# Altium PCB Connector.PcbDoc
Units mm, origin at the board's own origin, x right, y up, seen from the top; angles counter-clockwise.
Board outline 59.94 x 59.94 mm, 2 copper layers (Top Layer, Bottom Layer); 2 components, 34 nets, 118 pads, 196 vias.
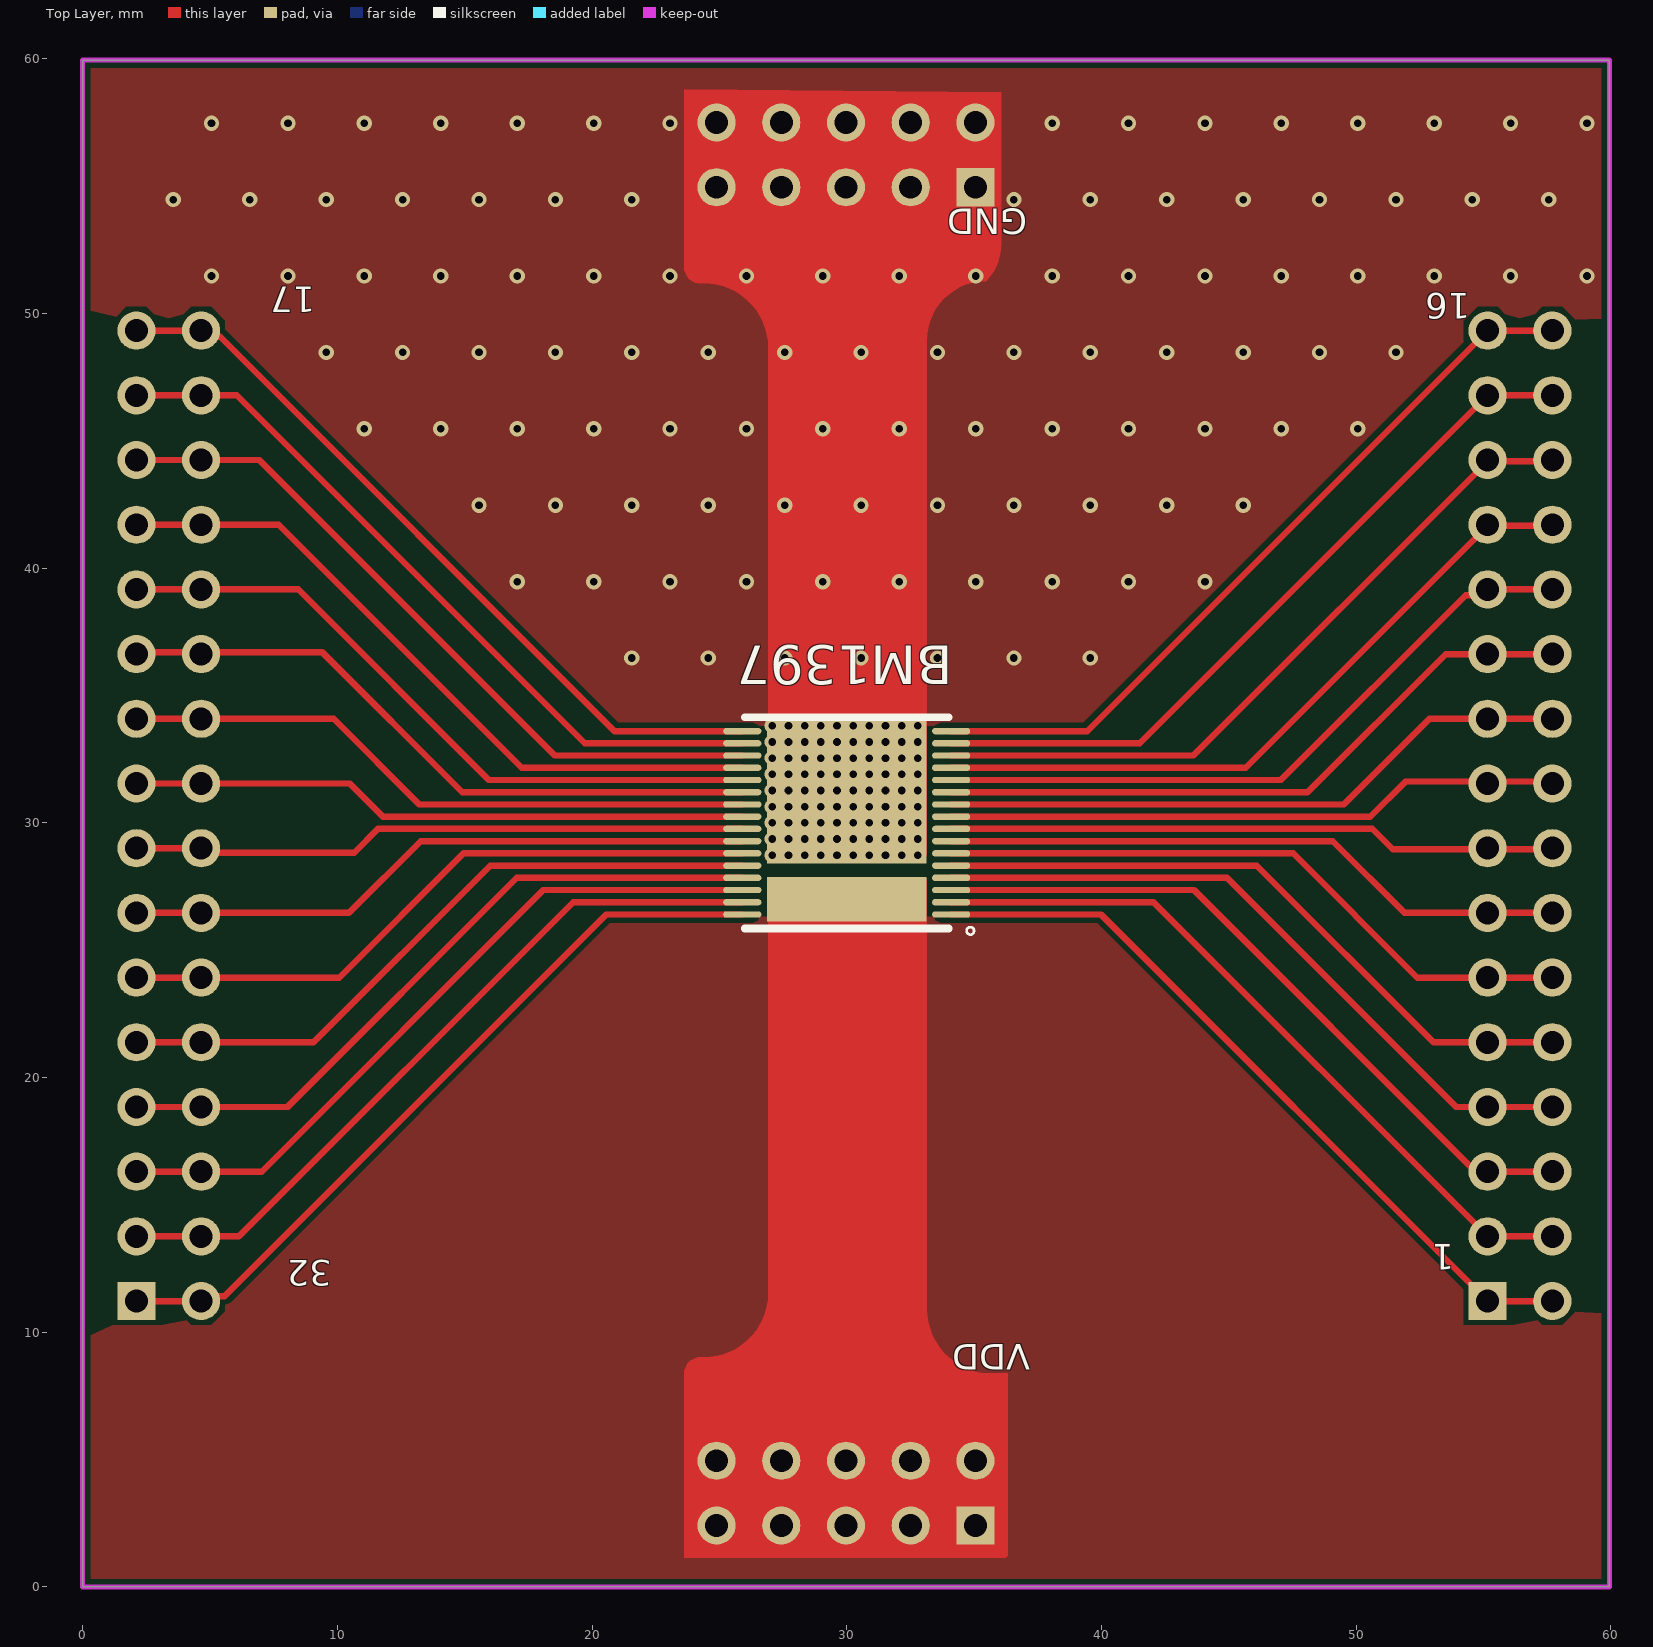
[diagram p0: Top Layer view]
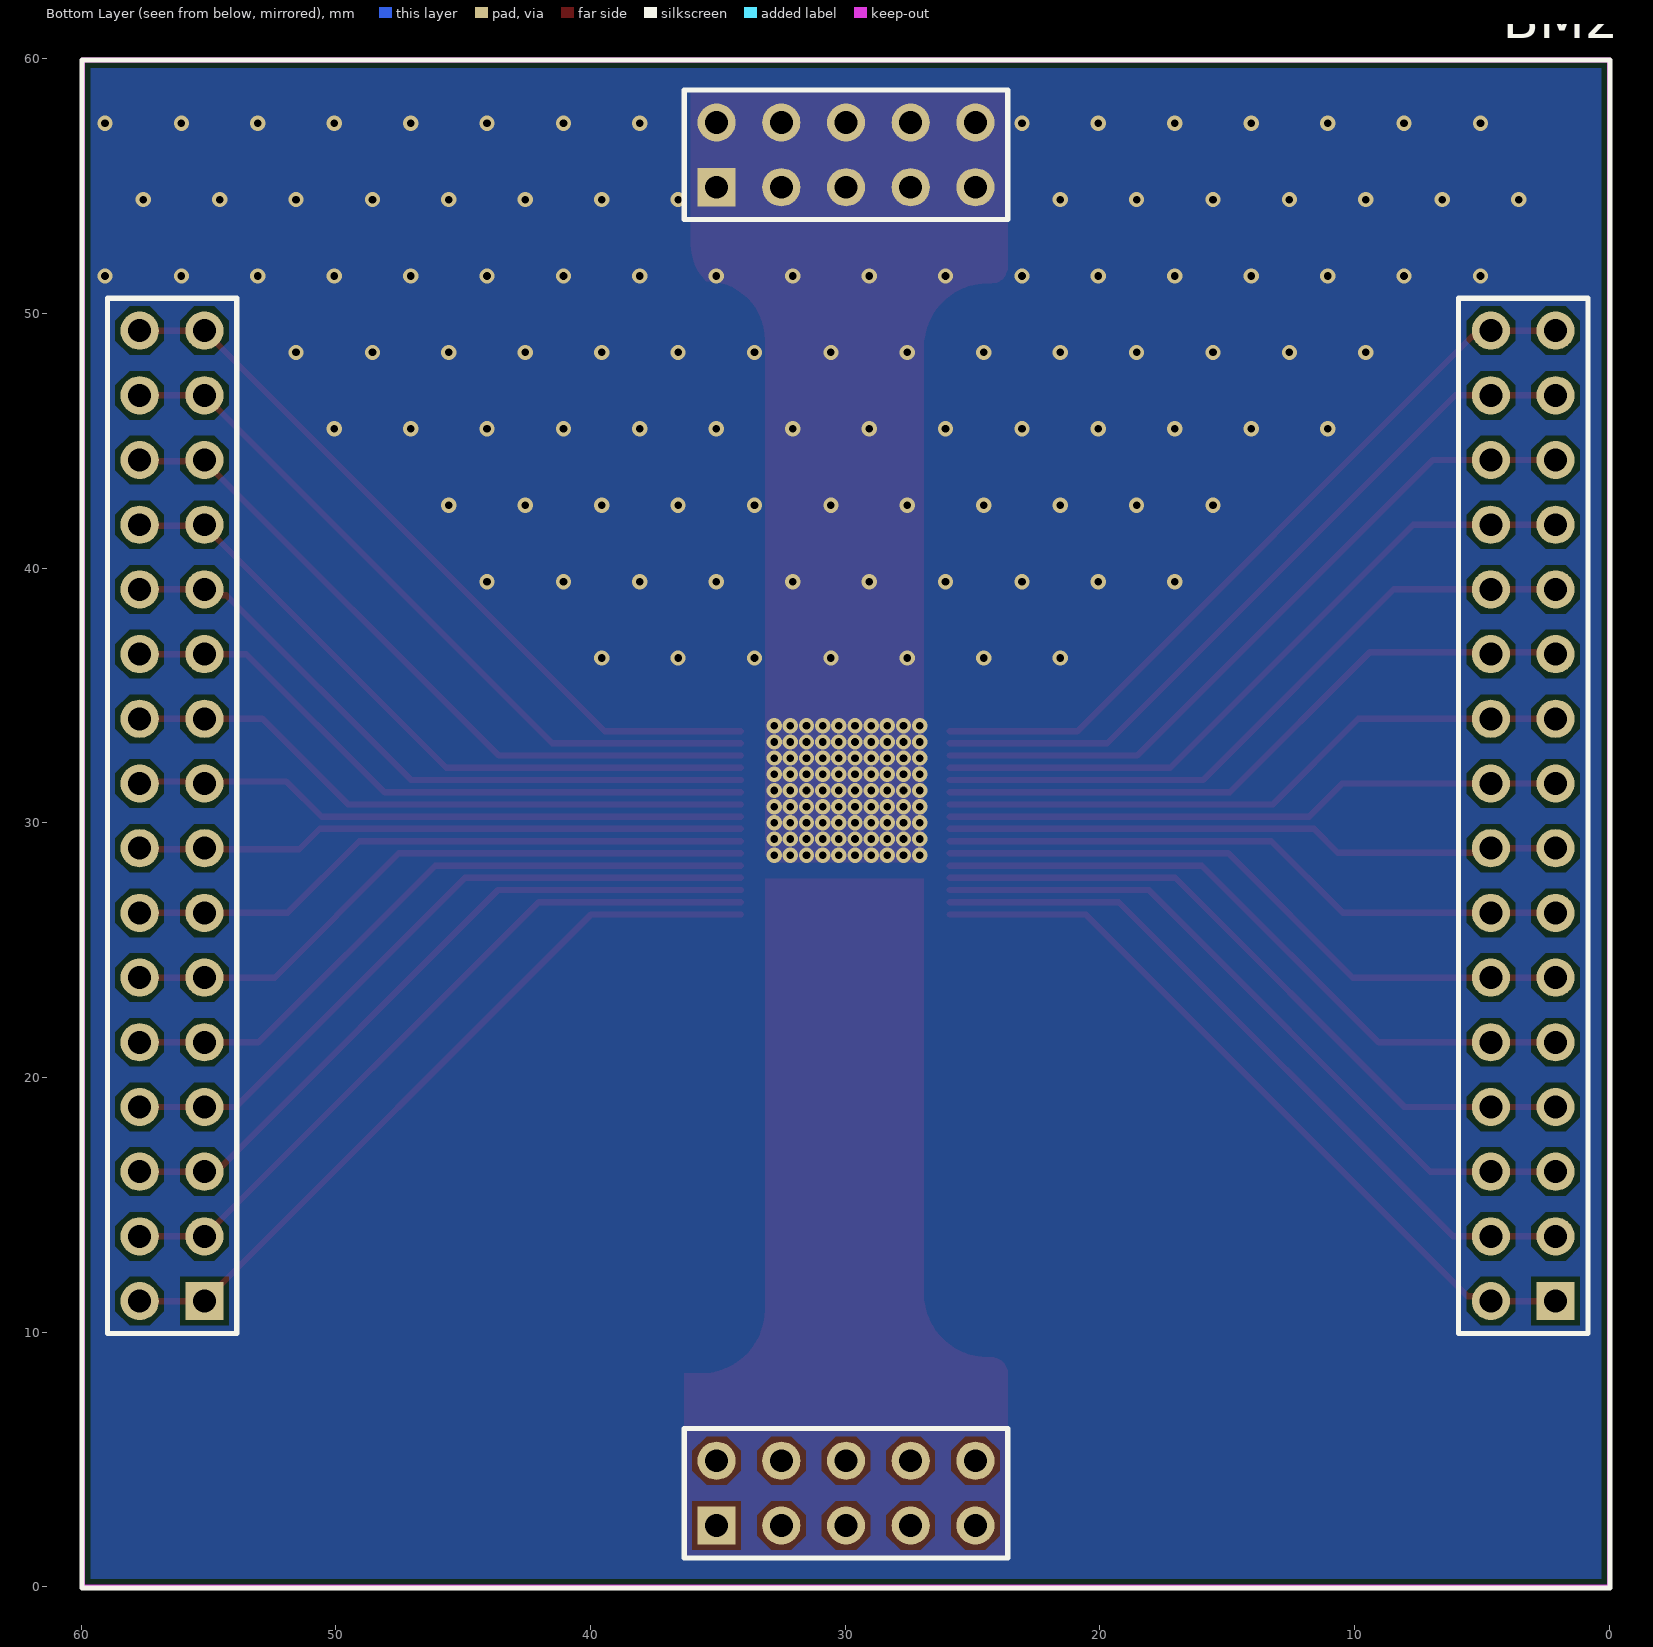
[diagram p1: Bottom Layer view, seen from below]

## Layer stack, top to bottom
Top Solder: solder mask 0.0102, Solder Resist, Dk 3.5
Top Layer: signal copper 0.0356
Dielectric 1: dielectric 0.32, FR-4, Dk 4.8
Bottom Layer: signal copper 0.0356
Bottom Solder: solder mask 0.0102, Solder Resist, Dk 3.5

## Board outline
0,0 0,59.944 59.944,59.944 59.944,0

## Design rules (kind name [scope] priority, off if disabled: settings)
Clearance [All] p1: gap=0.2 ignorepadtopadclearanceinfootprint=FALSE
PolygonConnect [All] p1: connectstyle=Direct reliefconductorwidth=0.254 reliefentries=4 polygonreliefangle="90 Angle" airgapwidth=0.254
RoomDefinition Connector [InComponentClass('Connector')] p1: confinementstyle=ConfineOut formatcopy=TRUE lockcomponents=FALSE outline -31.115,78.359 41.148,78.359 41.148,141.478 -31.115,141.478
RoutingVias [All] p1: holewidth=0.3 width=0.6 viastyle="Through Hole" minholewidth=0.3 minwidth=0.6 maxholewidth=0.3 maxwidth=0.6
SolderMaskExpansion [All] p1: expansion=0.102 istentingtop=FALSE
Width [All] p1: maxlimit=1 minlimit=0.2 preferedwidth=0.5
30 further rules are at their usual default settings.

## Components (designator, comment, footprint, x,y, rotation, side; value= is the part's Value field where it differs from the comment)
BM2 "BM1397" CONNECTOR 59.972,-0.047 r180 bottom locked
BM1397 "BM1397" BM1387 30,30 r180 top locked (schematic designator BM1)

## Footprints (in the part's own frame and the unit in brackets; to place one, negate y for a bottom-side part, rotate by r counter-clockwise, add the part's x,y. Pads: shape width x height; smd on the part's side, far side on the other; paste and mask are expansions set on the pad)
BM1387 [mm]
  oval 1.5x0.25 smd: 1(-4.1,3.6) 2(-4.1,3.12) 3(-4.1,2.64) 4(-4.1,2.16) 5(-4.1,1.68) 6(-4.1,1.2) 7(-4.1,0.72) 8(-4.1,0.24) 9(-4.1,-0.24) 10(-4.1,-0.72) 11(-4.1,-1.2) 12(-4.1,-1.68) 13(-4.1,-2.16) 14(-4.1,-2.64) 15(-4.1,-3.12) 16(-4.1,-3.6) 17(4.1,-3.6) 18(4.1,-3.12) 19(4.1,-2.64) 20(4.1,-2.16) 21(4.1,-1.68) 22(4.1,-1.2) 23(4.1,-0.72) 24(4.1,-0.24) 25(4.1,0.24) 26(4.1,0.72) 27(4.1,1.2) 28(4.1,1.68) 29(4.1,2.16) 30(4.1,2.64) 31(4.1,3.12) 32(4.1,3.6)
  rect 6.25x5.6 smd: 33(0,-1.2)
  rect 6.25x1.75 smd: 34(0,3)
  Top Layer pour cut-out: 4.953,3.683 -4.953,3.683 -4.953,-3.81 4.953,-3.81
  silkscreen extent -5,-4.15 4,4.39, body extent -4.09,-4.11 4.06,4.14, height 0.2
CONNECTOR [mm]
  round 1.5 hole 0.9: 1(2.27,11.27) 2(2.27,13.81) 2(4.81,13.81) 3(2.27,16.35) 3(4.81,16.35) 4(2.27,18.89) 4(4.81,18.89) 5(2.27,21.43) 5(4.81,21.43) 6(2.27,23.97) 6(4.81,23.97) 7(2.27,26.51) 7(4.81,26.51) 8(2.27,29.05) 8(4.81,29.05) 9(2.27,31.59) 9(4.81,31.59) 10(2.27,34.13) 10(4.81,34.13) 11(2.27,36.67) 11(4.81,36.67) 12(2.27,39.21) 12(4.81,39.21) 13(2.27,41.75) 13(4.81,41.75) 14(2.27,44.29) 14(4.81,44.29) 15(2.27,46.83) 15(4.81,46.83) 16(2.27,49.37) 16(4.81,49.37) 17(55.317,49.37) 17(57.857,49.37) 18(55.317,46.83) 18(57.857,46.83) 19(55.317,44.29) 19(57.857,44.29) 20(55.317,41.75) 20(57.857,41.75) 21(55.317,39.21) 21(57.857,39.21) 22(55.317,36.67) 22(57.857,36.67) 23(55.317,34.13) 23(57.857,34.13) 24(55.317,31.59) 24(57.857,31.59) 25(55.317,29.05) 25(57.857,29.05) 26(55.317,26.51) 26(57.857,26.51) 27(55.317,23.97) 27(57.857,23.97) 28(55.317,21.43) 28(57.857,21.43) 29(55.317,18.89) 29(57.857,18.89) 30(55.317,16.35) 30(57.857,16.35) 31(55.317,13.81) 31(57.857,13.81) 32(55.317,11.27) 33(24.92,57.54) 33(27.46,55) 33(27.46,57.54) 33(30,55) 33(30,57.54) 33(32.54,55) 33(32.54,57.54) 33(35.08,55) 33(35.08,57.54) 34(24.92,5) 34(27.46,2.46) 34(27.46,5) 34(30,2.46) 34(30,5) 34(32.54,2.46) 34(32.54,5) 34(35.08,2.46) 34(35.08,5)
  rect 1.5x1.5 hole 0.9: 1(4.81,11.27) 32(57.857,11.27) 33(24.92,55) 34(24.92,2.46)
  silkscreen extent 0,0 60,60

## Part data
BM2 BM1397: library part BM1397_0

## Via types
v1: diameter 0.6, hole 0.3, Top Layer to Bottom Layer, 196 vias

## Nets (pads, with @x,y where several pads share a name; then routed paths per layer and width w, separated by ;. In a path a pad name is that pad's centre, name@x,y a point inside that pad or via, vN(x,y) a via of type N, cw(c..) or ccw(c..) an arc to the next point about the centre after c; other vN are vias at no path point)
1: BM2.1 BM1397.1 | length 29.9
  Top Layer w0.25: BM1397.1 39.985,26.4 55.162,11.223 BM2.1@57.702,11.223
2: BM2.2 BM1397.2 | length 29
  Top Layer w0.25: BM1397.2 42.045,26.88 55.162,13.763 BM2.2@57.702,13.763
3: BM2.3 BM1397.3 | length 28.2
  Top Layer w0.25: BM1397.3 43.633,27.36 54.451,16.542 54.923,16.542 55.162,16.303 BM2.3@57.702,16.303
4: BM2.4 BM1397.4 | length 27.3
  Top Layer w0.25: BM1397.4 44.931,27.84 53.928,18.843 55.162,18.843 BM2.4@57.702,18.843
5: BM2.5 BM1397.5 | length 26.5
  Top Layer w0.25: BM1397.5 46.102,28.32 53.039,21.383 55.162,21.383 BM2.5@57.702,21.383
6: BM2.6 BM1397.6 | length 25.6
  Top Layer w0.25: BM1397.6 47.527,28.8 52.404,23.923 55.162,23.923 BM2.6@57.702,23.923
7: BM2.7 BM1397.7 | length 24.8
  Top Layer w0.25: BM1397.7 49.079,29.28 51.896,26.463 55.162,26.463 BM2.7@57.702,26.463
8: BM2.8 BM1397.8 | length 24
  Top Layer w0.25: BM1397.8 50.631,29.76 51.435,28.956 55.162,28.956 57.655,28.956 BM2.8@57.702,29.003
9: BM2.9 BM1397.9 | length 24.2
  Top Layer w0.25: BM1397.9 50.56,30.24 51.943,31.623 55.162,31.623 57.622,31.623 BM2.9@57.702,31.543
10: BM2.10 BM1397.10 | length 25
  Top Layer w0.25: BM1397.10 49.516,30.72 52.879,34.083 55.162,34.083 BM2.10@57.702,34.083
11: BM2.11 BM1397.11 | length 25.8
  Top Layer w0.25: BM1397.11 48.091,31.2 53.514,36.623 55.162,36.623 BM2.11@57.702,36.623
12: BM2.12 BM1397.12 | length 26.7
  Top Layer w0.25: BM1397.12 47.047,31.68 54.301,38.934 54.933,38.934 55.162,39.163 BM2.12@57.702,39.163
13: BM2.13 BM1397.13 | length 27.6
  Top Layer w0.25: BM1397.13 45.666,32.16 55.162,41.656 57.655,41.656 BM2.13@57.702,41.703
14: BM2.14 BM1397.14 | length 28.4
  Top Layer w0.25: BM1397.14 43.606,32.64 55.162,44.196 57.655,44.196 BM2.14@57.702,44.243
15: BM2.15 BM1397.15 | length 29.3
  Top Layer w0.25: BM1397.15 41.499,33.12 55.162,46.783 BM2.15@57.702,46.783
16: BM2.16 BM1397.16 | length 30.1
  Top Layer w0.25: BM1397.16 39.439,33.6 55.162,49.323 BM2.16@57.702,49.323
17: BM2.17 BM1397.17 | length 30.3
  Top Layer w0.25: BM2.17@2.115,49.323 4.655,49.323 4.894,49.084 5.399,49.084 20.883,33.6 BM1397.17
18: BM2.18 BM1397.18 | length 29.4
  Top Layer w0.25: BM2.18@2.115,46.783 4.655,46.783 6.049,46.783 19.712,33.12 BM1397.18
19: BM2.19 BM1397.19 | length 28.6
  Top Layer w0.25: BM2.19@2.115,44.243 4.655,44.243 6.938,44.243 18.541,32.64 BM1397.19
20: BM2.20 BM1397.20 | length 27.7
  Top Layer w0.25: BM2.20@2.115,41.703 4.655,41.703 7.7,41.703 17.243,32.16 BM1397.20
21: BM2.21 BM1397.21 | length 26.9
  Top Layer w0.25: BM2.21@2.115,39.163 4.655,39.163 8.462,39.163 15.945,31.68 BM1397.21
22: BM2.22 BM1397.22 | length 26.1
  Top Layer w0.25: BM2.22@2.115,36.623 2.195,36.703 9.398,36.703 14.901,31.2 BM1397.22
23: BM2.23 BM1397.23 | length 25.2
  Top Layer w0.25: BM2.23@2.115,34.083 4.655,34.083 9.859,34.083 13.222,30.72 BM1397.23
24: BM2.24 BM1397.24 | length 24.3
  Top Layer w0.25: BM2.24@2.115,31.543 4.655,31.543 10.494,31.543 11.797,30.24 BM1397.24
25: BM2.25 BM1397.25 | length 24.2
  Top Layer w0.25: BM2.25@2.115,29.003 4.655,29.003 4.829,28.829 10.668,28.829 11.599,29.76 BM1397.25
26: BM2.26 BM1397.26 | length 25
  Top Layer w0.25: BM2.26@2.115,26.463 4.655,26.463 10.461,26.463 13.278,29.28 BM1397.26
27: BM2.27 BM1397.27 | length 25.8
  Top Layer w0.25: BM2.27@2.115,23.923 4.655,23.923 10.08,23.923 14.957,28.8 BM1397.27
28: BM2.28 BM1397.28 | length 26.7
  Top Layer w0.25: BM2.28@2.115,21.383 4.655,21.383 9.064,21.383 16.001,28.32 BM1397.28
29: BM2.29 BM1397.29 | length 27.5
  Top Layer w0.25: BM2.29@2.115,18.843 4.655,18.843 8.048,18.843 17.045,27.84 BM1397.29
30: BM2.30 BM1397.30 | length 28.4
  Top Layer w0.25: BM2.30@2.115,16.303 4.655,16.303 7.032,16.303 18.089,27.36 BM1397.30
31: BM2.31 BM1397.31 | length 29.2
  Top Layer w0.25: BM2.31@2.115,13.763 4.655,13.763 6.143,13.763 19.26,26.88 BM1397.31
32: BM2.32 BM1397.32 | length 30.1
  Top Layer w0.25: BM2.32@2.115,11.223 4.655,11.223 4.837,11.405 5.563,11.405 20.558,26.4 BM1397.32
33: BM2.33 BM1397.33 | length 46.3
  Top Layer w0.25: BM2.33@24.892,54.953 27.432,54.953 BM2.33@29.972,54.953 ; BM2.33@24.892,57.493 27.432,57.493 29.972,57.493 32.512,57.493 35.052,57.493 35.052,55.547 34.345,54.841 34.186,54.841 34.074,54.953 32.512,54.953 BM2.33@29.972,54.953 ; BM1397.33@29.972,31.27 BM2.33@29.972,54.953
  other v1: 27.079,28.73 27.714,28.73 28.349,28.73 28.984,28.73 29.619,28.73 30.254,28.73 30.889,28.73 31.524,28.73 32.159,28.73 32.794,28.73 27.079,29.365 27.714,29.365 28.349,29.365 28.984,29.365 29.619,29.365 30.254,29.365 30.889,29.365 31.524,29.365 32.159,29.365 32.794,29.365 27.079,30 27.714,30 28.349,30 28.984,30 29.619,30 30.254,30 30.889,30 31.524,30 32.159,30 32.794,30 27.079,30.635 27.714,30.635 28.349,30.635 28.984,30.635 29.619,30.635 30.254,30.635 30.889,30.635 31.524,30.635 32.159,30.635 32.794,30.635 27.079,31.27 27.714,31.27 28.349,31.27 28.984,31.27 29.619,31.27 30.254,31.27 30.889,31.27 31.524,31.27 32.159,31.27 32.794,31.27 27.079,31.905 27.714,31.905 28.349,31.905 28.984,31.905 29.619,31.905 30.254,31.905 30.889,31.905 31.524,31.905 32.159,31.905 32.794,31.905 27.079,32.54 27.714,32.54 28.349,32.54 28.984,32.54 29.619,32.54 30.254,32.54 30.889,32.54 31.524,32.54 32.159,32.54 32.794,32.54 27.079,33.175 27.714,33.175 28.349,33.175 28.984,33.175 29.619,33.175 30.254,33.175 30.889,33.175 31.524,33.175 32.159,33.175 32.794,33.175 27.079,33.81 27.714,33.81 28.349,33.81 28.984,33.81 29.619,33.81 30.254,33.81 30.889,33.81 31.524,33.81 32.159,33.81 32.794,33.81 21.564,36.468 24.564,36.468 27.564,36.468 30.564,36.468 33.564,36.468 36.564,36.468 39.564,36.468 17.064,39.468 20.064,39.468 23.064,39.468 26.064,39.468 29.064,39.468 32.064,39.468 35.064,39.468 38.064,39.468 41.064,39.468 44.064,39.468 15.564,42.468 18.564,42.468 21.564,42.468 24.564,42.468 27.564,42.468 30.564,42.468 33.564,42.468 36.564,42.468 39.564,42.468 42.564,42.468 45.564,42.468 11.064,45.468 14.064,45.468 17.064,45.468 20.064,45.468 23.064,45.468 26.064,45.468 29.064,45.468 32.064,45.468 35.064,45.468 38.064,45.468 41.064,45.468 44.064,45.468 47.064,45.468 50.064,45.468 9.564,48.468 12.564,48.468 15.564,48.468 18.564,48.468 21.564,48.468 24.564,48.468 27.564,48.468 30.564,48.468 33.564,48.468 36.564,48.468 39.564,48.468 42.564,48.468 45.564,48.468 48.564,48.468 51.564,48.468 5.064,51.468 8.064,51.468 11.064,51.468 14.064,51.468 17.064,51.468 20.064,51.468 23.064,51.468 26.064,51.468 29.064,51.468 32.064,51.468 35.064,51.468 38.064,51.468 41.064,51.468 44.064,51.468 47.064,51.468 50.064,51.468 53.064,51.468 56.064,51.468 59.064,51.468 3.564,54.468 6.564,54.468 9.564,54.468 12.564,54.468 15.564,54.468 18.564,54.468 21.564,54.468 36.564,54.468 39.564,54.468 42.564,54.468 45.564,54.468 48.564,54.468 51.564,54.468 54.564,54.468 57.564,54.468 5.064,57.468 8.064,57.468 11.064,57.468 14.064,57.468 17.064,57.468 20.064,57.468 23.064,57.468 38.064,57.468 41.064,57.468 44.064,57.468 47.064,57.468 50.064,57.468 53.064,57.468 56.064,57.468 59.064,57.468
34: BM2.34 BM1397.34 | length 44.9
  Top Layer w0.25: BM2.34@24.892,2.413 27.432,2.413 29.972,2.413 32.512,2.413 35.052,2.413 35.052,4.953 32.512,4.953 BM2.34@29.972,4.953 ; BM2.34@24.892,4.953 27.432,4.953 BM2.34@29.972,4.953 ; BM1397.34 29.972,26.972 BM2.34@29.972,4.953

## Polygon pours and split planes (outlines as drawn)
34 on Top Layer "34_L01_P002" (solid, remove dead copper, pour order 2): 0,28.194 0,0 59.944,0 59.944,28.321
33 on Top Layer "33_L01_P000" (solid, remove dead copper, pour order 0): 0,59.944 0,0 59.944,0 59.944,59.944
33 on Bottom Layer "33_L02_P001" (solid, remove dead copper, pour order 1): 0,59.944 59.944,59.944 59.944,0 0,0

## Keep-outs
Keep-Out Layer:
  the board outline again, w0.2

## Other copper
Top Layer:
  region net 34: 26.924,27.813 26.924,11.557 cw(c24.384,11.557) 24.384,9.017 24.257,9.017 ccw(c24.257,8.382) 23.622,8.382 23.622,1.143 36.195,1.143 ccw(c36.195,1.27) 36.322,1.27 36.322,8.382 35.687,8.382 cw(c35.687,10.922) 33.147,10.922 33.147,27.813
  region net 33: 23.622,58.801 23.622,51.816 ccw(c24.257,51.816) 24.257,51.181 24.384,51.181 cw(c24.384,48.641) 26.924,48.641 26.924,28.702 ccw(c27.178,28.702) 27.178,28.448 32.766,28.448 ccw(c32.766,28.829) 33.147,28.829 33.147,48.942 cw(c35.473,48.942) 35.473,51.268 ccw(c34.036,52.705) 36.068,52.705 36.068,58.674

## Silkscreen, mask and mechanical layers (free items; w line width, h text height)
Top Overlay:
  text "GND" at 37.084,54.102 h1 r180
  text "17" at 9.144,51.054 h1 r180
  text "16" at 54.483,50.8 h1 r180
  text "1" at 53.848,13.462 h1 r180
  text "32" at 9.779,12.827 h1 r180
  text "VDD" at 37.211,9.525 h1 r180